# EAGLE board multiple_tile-panel (EAGLE 6.6.0)
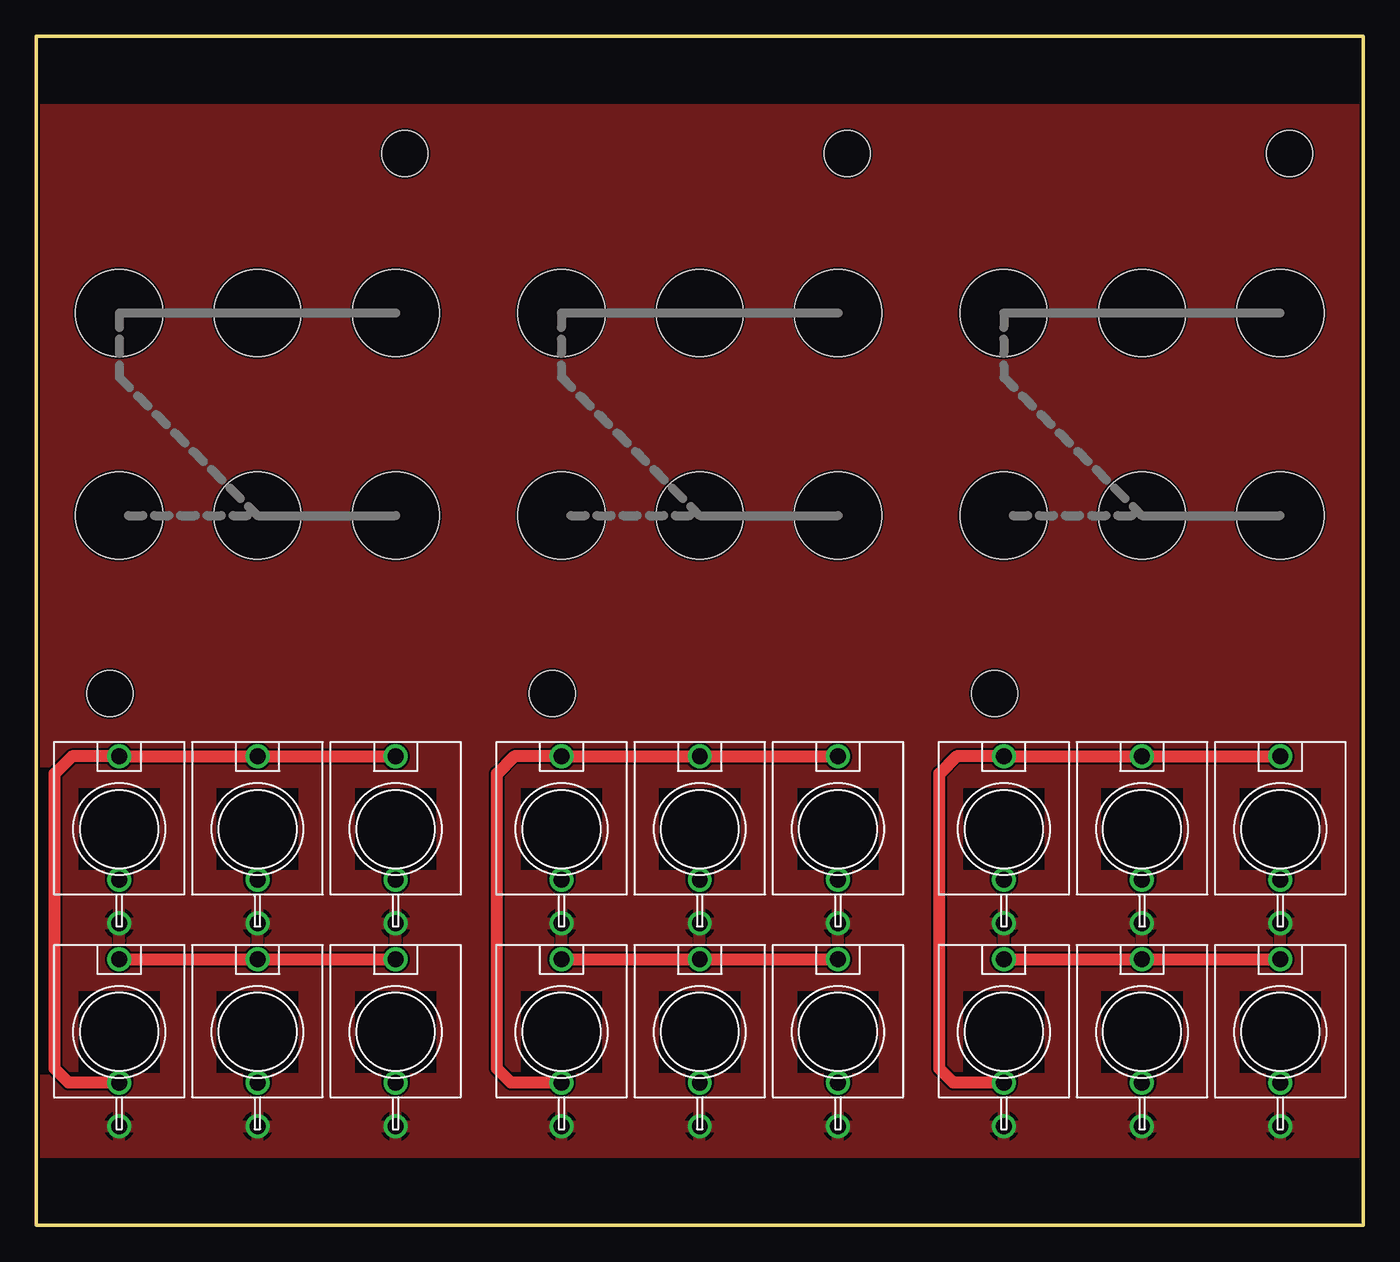
[diagram p0: board, top side]
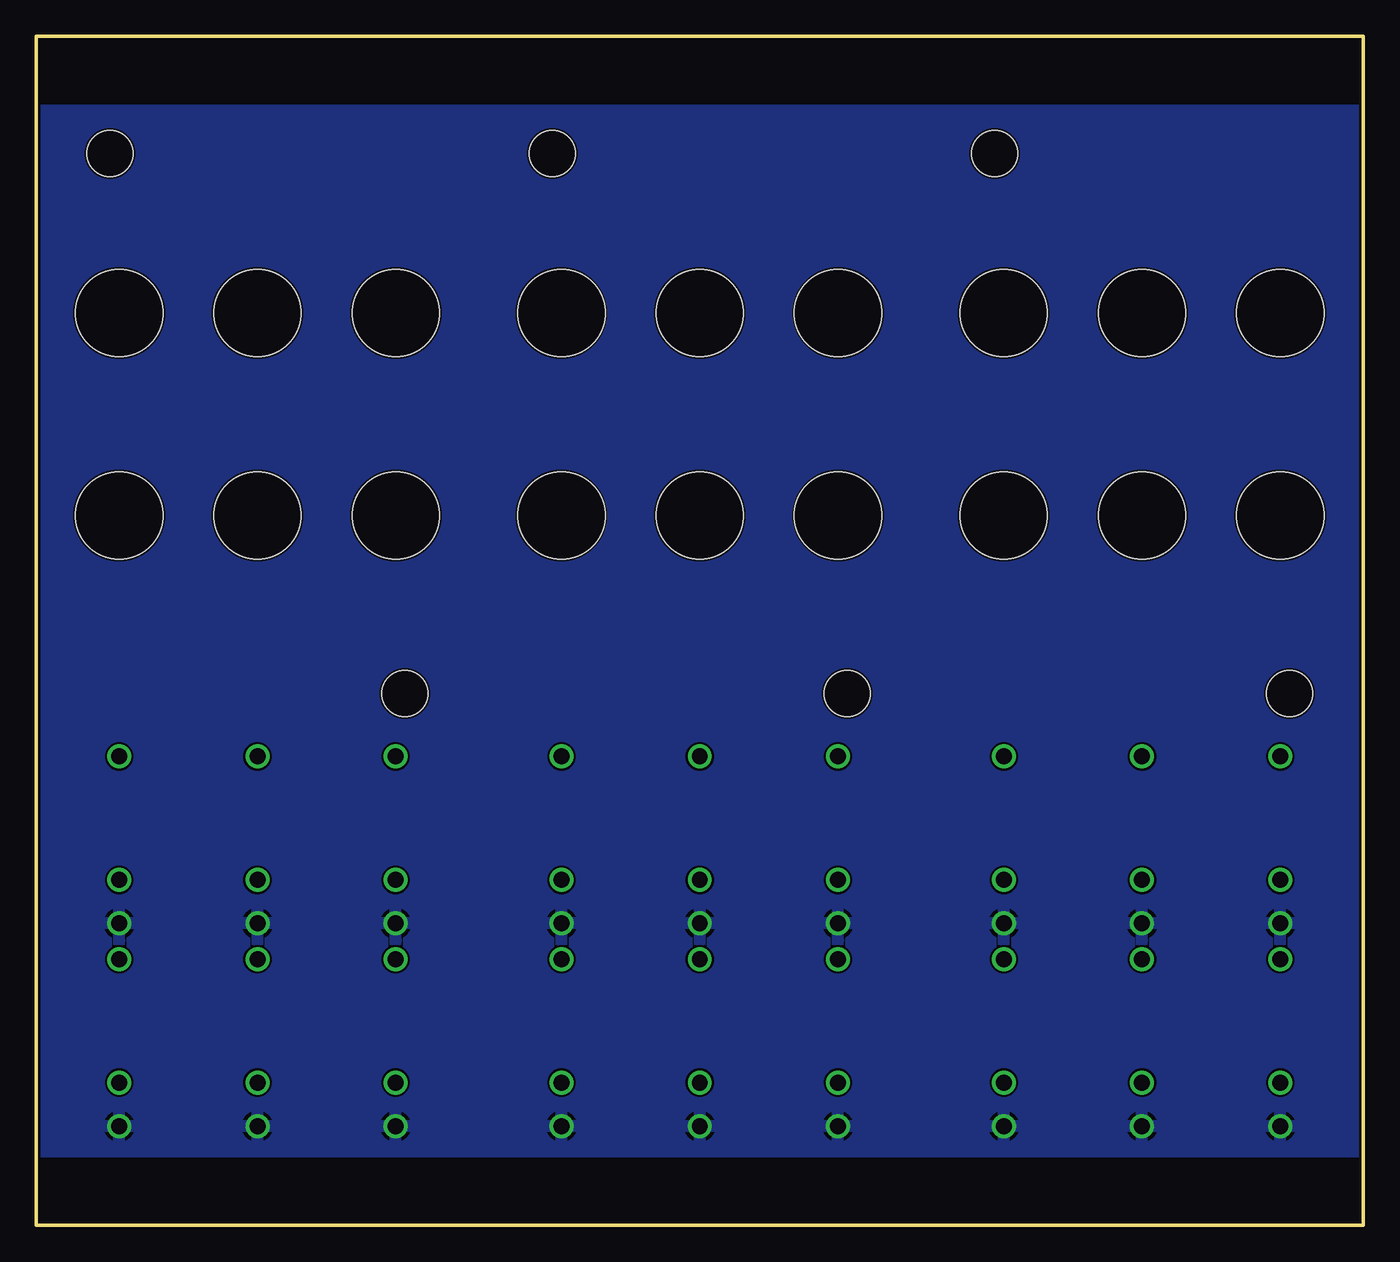
[diagram p1: board, bottom side, seen from below]

Size 91.44 x 81.91 mm. Coordinates in mm from the lower left corner, seen from the top.
Outline: 0,0 0,81.91 91.44,81.91 91.44,0 0,0
Copper layers (1*16): Top 0.035mm / dielectric 1.5mm / Bottom 0.035mm
Design rules "hackvana": minimum track width 6mil, minimum drill 0.3mm, track to track 6mil, track to pad 9mil, pad to pad 6mil, via to via 6mil, smd to smd 0mil, copper to edge 6mil, drill to drill 6mil, minimum pad ring 10mil, minimum via ring 6mil, stop-mask expansion 2mil, vias tented up to drill 100mil, thermal gap 10mil
Holes 3.17 mm at 5.08,36.65 25.4,73.84 35.56,36.65 55.88,73.84 66.04,36.65 86.36,73.84
Holes 6 mm at 5.71,62.86 15.24,62.86 24.76,62.86 5.71,48.89 15.24,48.89 24.76,48.89 36.2,62.86 45.72,62.86 55.24,62.86 36.2,48.89 45.72,48.89 55.24,48.89 66.67,62.86 76.2,62.86 85.72,62.86 66.67,48.89 76.2,48.89 85.72,48.89

## Footprints (pad centres in the part's own frame; a part is rotated, then mirrored left to right if it is on the bottom)
WQP-PJ301M-12_JACK = drill 1.1: P$1 0,5; P$2 0,-3.5; P$3 0,-6.5

## Placement (x,y rotation side)
U$1  WQP-PJ301M-12_JACK  [WQP-PJ301M-12_JACK]  24.76,27.3 0 top
U$2  WQP-PJ301M-12_JACK  [WQP-PJ301M-12_JACK]  15.24,27.3 0 top
U$3  WQP-PJ301M-12_JACK  [WQP-PJ301M-12_JACK]  5.71,27.3 0 top
U$4  WQP-PJ301M-12_JACK  [WQP-PJ301M-12_JACK]  15.24,13.34 0 top
U$5  WQP-PJ301M-12_JACK  [WQP-PJ301M-12_JACK]  24.76,13.34 0 top
U$6  WQP-PJ301M-12_JACK  [WQP-PJ301M-12_JACK]  5.71,13.34 0 top
U$7  WQP-PJ301M-12_JACK  [WQP-PJ301M-12_JACK]  55.24,27.3 0 top
U$8  WQP-PJ301M-12_JACK  [WQP-PJ301M-12_JACK]  45.72,27.3 0 top
U$9  WQP-PJ301M-12_JACK  [WQP-PJ301M-12_JACK]  36.2,27.3 0 top
U$10  WQP-PJ301M-12_JACK  [WQP-PJ301M-12_JACK]  45.72,13.34 0 top
U$11  WQP-PJ301M-12_JACK  [WQP-PJ301M-12_JACK]  55.24,13.34 0 top
U$12  WQP-PJ301M-12_JACK  [WQP-PJ301M-12_JACK]  36.2,13.34 0 top
U$13  WQP-PJ301M-12_JACK  [WQP-PJ301M-12_JACK]  85.72,27.3 0 top
U$14  WQP-PJ301M-12_JACK  [WQP-PJ301M-12_JACK]  76.2,27.3 0 top
U$15  WQP-PJ301M-12_JACK  [WQP-PJ301M-12_JACK]  66.67,27.3 0 top
U$16  WQP-PJ301M-12_JACK  [WQP-PJ301M-12_JACK]  76.2,13.34 0 top
U$17  WQP-PJ301M-12_JACK  [WQP-PJ301M-12_JACK]  85.72,13.34 0 top
U$18  WQP-PJ301M-12_JACK  [WQP-PJ301M-12_JACK]  66.67,13.34 0 top

## Library data of the parts
U$1-U$18 = thonkiconn

## Nets
GND: U$1.P$3 U$2.P$3 U$3.P$3 U$4.P$3 U$5.P$3 U$6.P$3
GND1: U$7.P$3 U$8.P$3 U$9.P$3 U$10.P$3 U$11.P$3 U$12.P$3
GND2: U$13.P$3 U$14.P$3 U$15.P$3 U$16.P$3 U$17.P$3 U$18.P$3
SIG1: U$1.P$1 U$2.P$1 U$3.P$1 U$6.P$2
SIG2: U$4.P$1 U$5.P$1 U$6.P$1
SIG3: U$10.P$1 U$11.P$1 U$12.P$1
SIG4: U$7.P$1 U$8.P$1 U$9.P$1 U$12.P$2
SIG5: U$16.P$1 U$17.P$1 U$18.P$1
SIG6: U$13.P$1 U$14.P$1 U$15.P$1 U$18.P$2

## Tracks (layer width: path | path; a pad name or v marks a point on that pad's centre or on a via)
GND
  pour Bottom: 0,76.83 0,5.08 30.48,5.08 30.48,76.83
  pour Top: 0,76.83 0,5.08 30.48,5.08 30.48,76.83
GND1
  pour Bottom: 30.48,76.83 30.48,5.08 60.96,5.08 60.96,76.83
  pour Top: 30.48,76.83 30.48,5.08 60.96,5.08 60.96,76.83
GND2
  pour Bottom: 60.96,76.83 60.96,5.08 91.44,5.08 91.44,76.83
  pour Top: 60.96,76.83 60.96,5.08 91.44,5.08 91.44,76.83
SIG1
  Top 0.813: U$1.P$1 U$2.P$1 U$3.P$1 2.46,32.3 1.27,31.12 1.27,10.79 2.23,9.84 U$6.P$2
SIG2
  Top 0.813: U$6.P$1 U$4.P$1 U$5.P$1
SIG3
  Top 0.813: U$12.P$1 U$10.P$1 U$11.P$1
SIG4
  Top 0.813: U$7.P$1 U$8.P$1 U$9.P$1 32.94,32.3 31.75,31.12 31.75,10.79 32.71,9.84 U$12.P$2
SIG5
  Top 0.813: U$18.P$1 U$16.P$1 U$17.P$1
SIG6
  Top 0.813: U$13.P$1 U$14.P$1 U$15.P$1 63.42,32.3 62.23,31.12 62.23,10.79 63.19,9.84 U$18.P$2